# Altium PCB FLIR LWIR.PcbDoc (part 1 of 5)
Units mil, origin at the board's own origin, x right, y up, seen from the top; angles counter-clockwise.
Board outline 1511 x 3115 mil, 2 copper layers (Top Layer, Bottom Layer); 105 components, 128 nets, 625 pads, 229 vias.
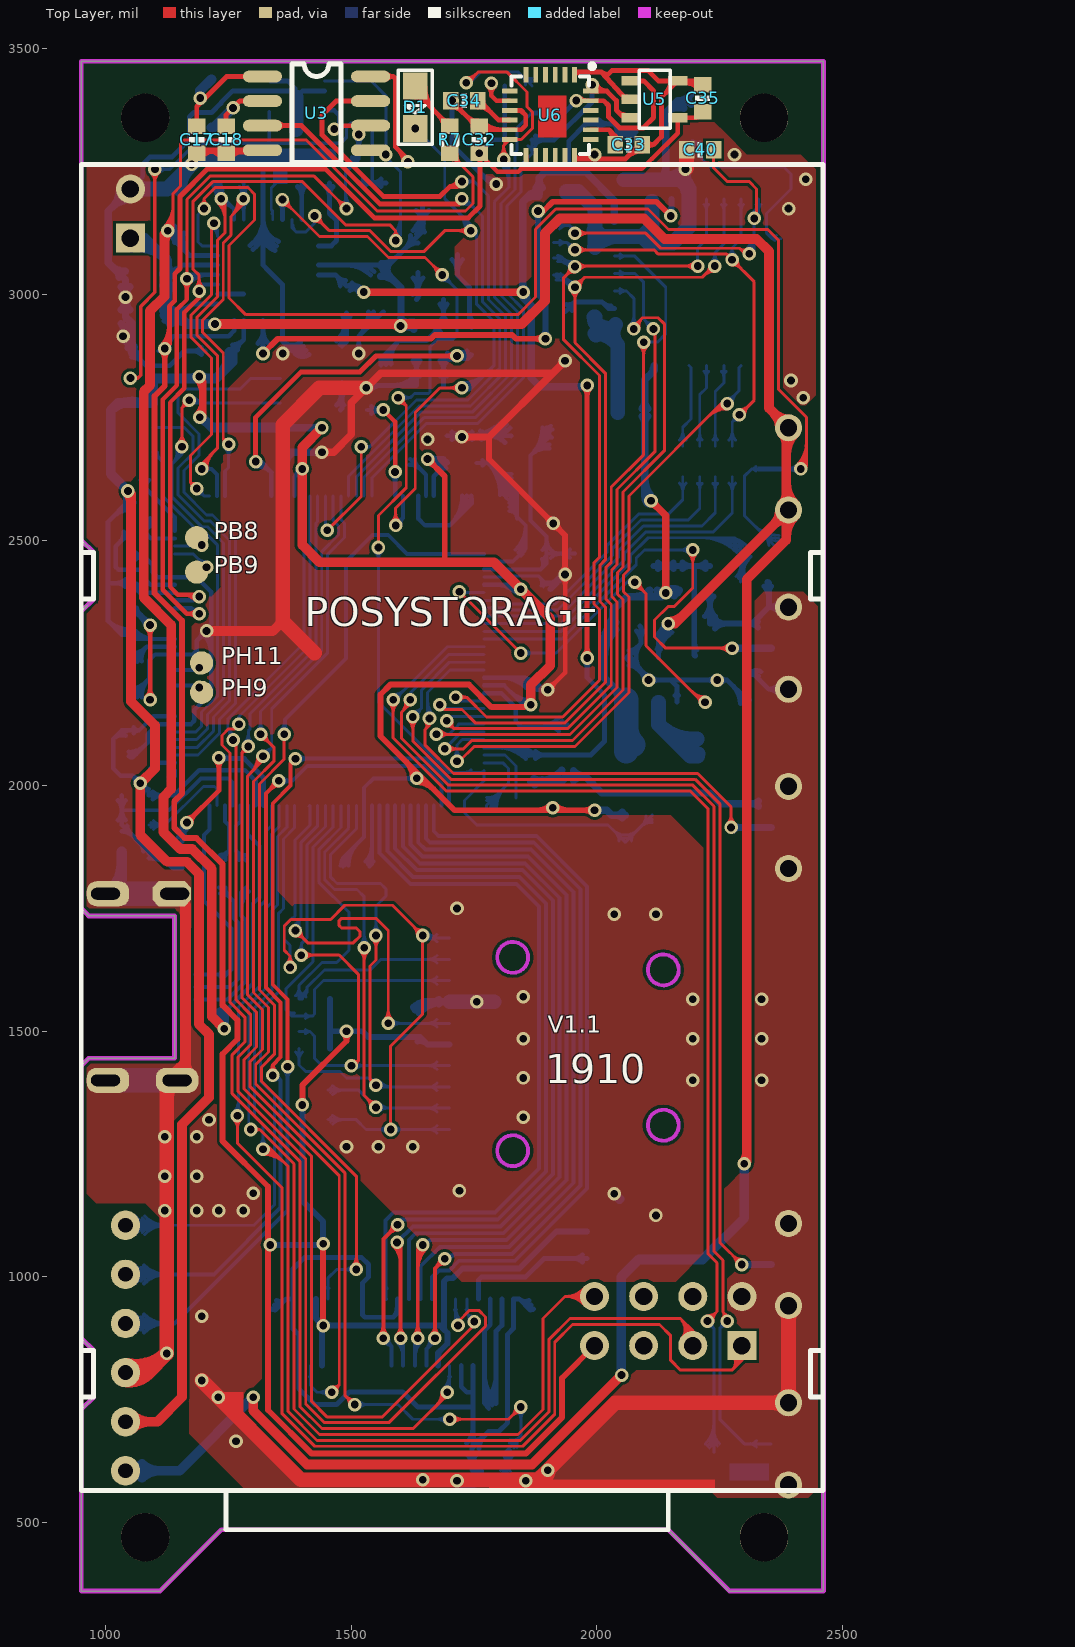
[diagram p0: Top Layer view]
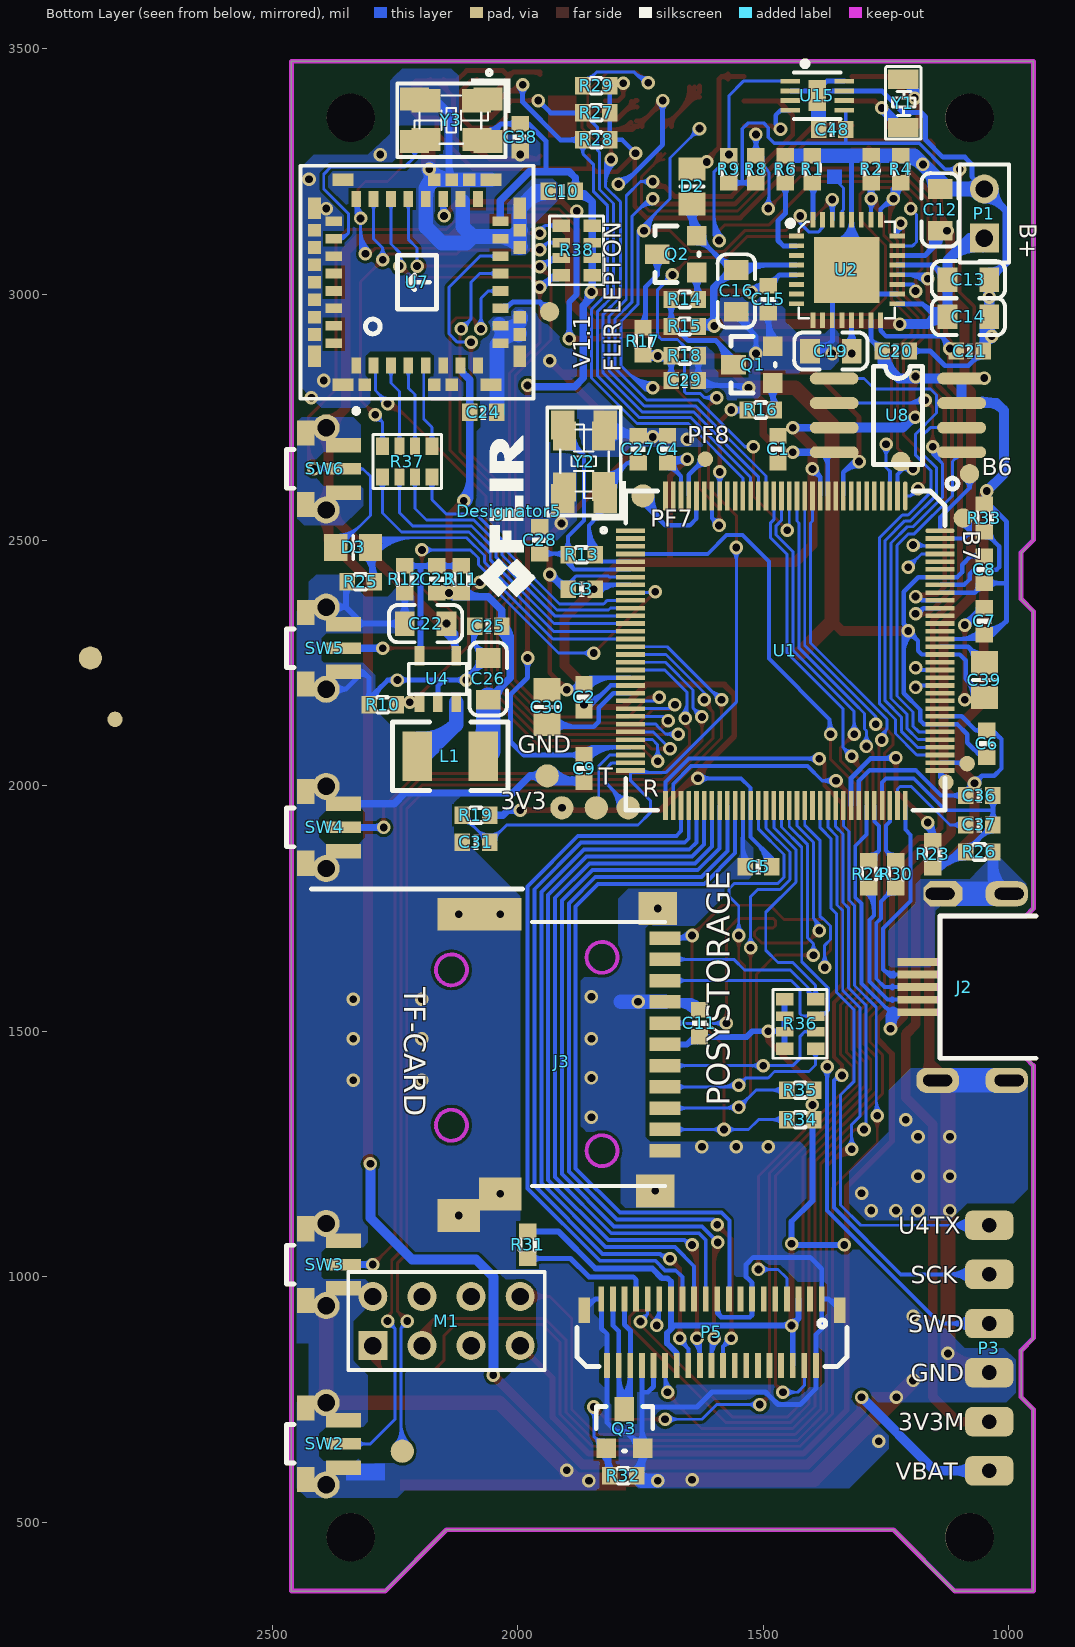
[diagram p1: Bottom Layer view, seen from below]
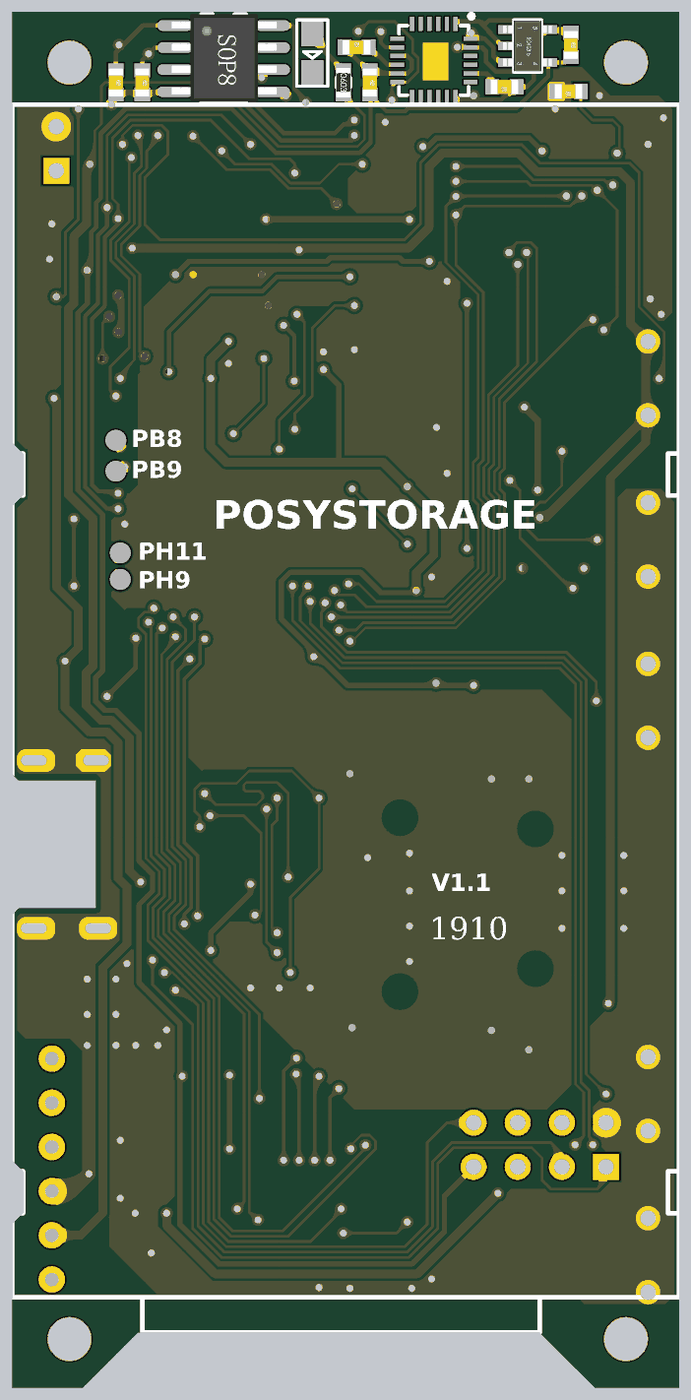
[diagram p6: 3D render of the assembled board from above, using the file's embedded part models]
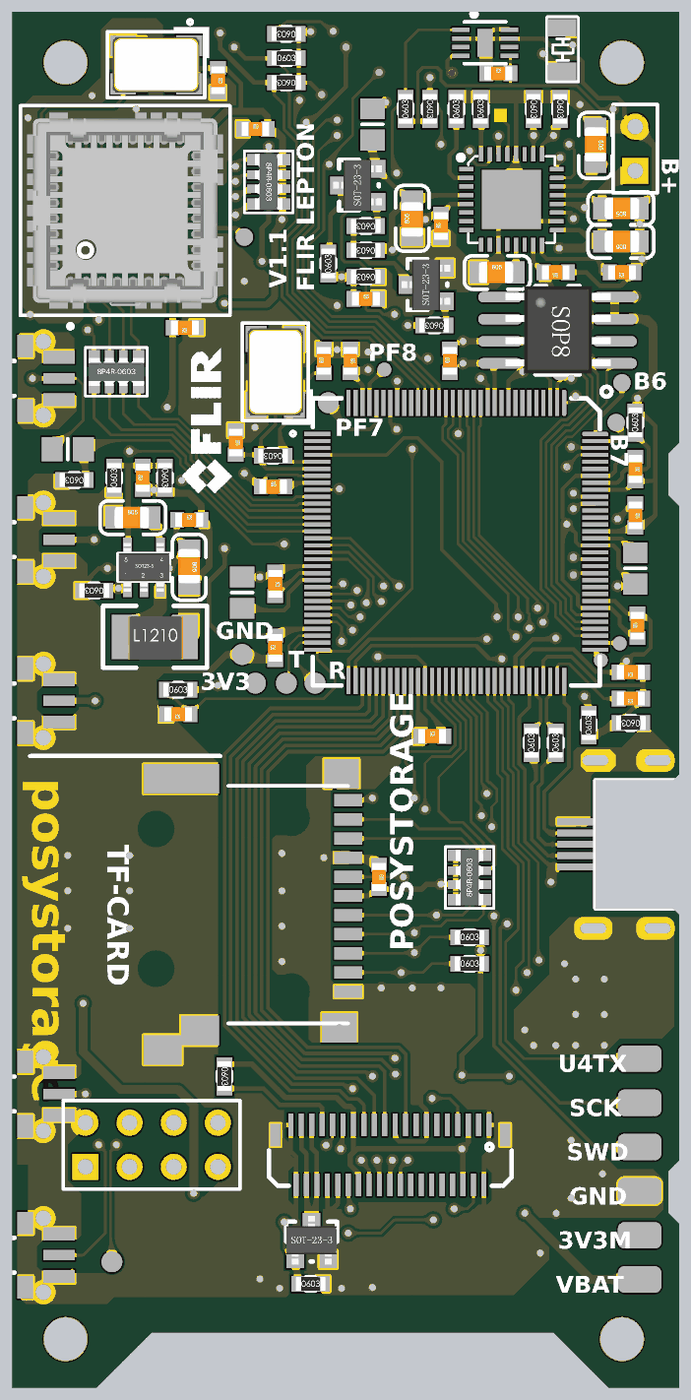
[diagram p7: 3D render of the assembled board from below, using the file's embedded part models]

## Layer stack, top to bottom
Top Solder: solder mask 0.4, Solder Resist, Dk 3.5
Top Layer: signal copper 1.4
Dielectric 1: dielectric 12.6, FR-4, Dk 4.8
Bottom Layer: signal copper 1.4
Bottom Solder: solder mask 0.4, Solder Resist, Dk 3.5

## Board outline
950,3475 950,2500 975,2475 975,2380 950,2355 950,1750 965,1735 1140,1735 1140,1445 975,1445 965,1445 950,1430 950,1415 950,875 970,855 975,850 975,755 950,730 950,360 1110,360 1235,485 2145,485 2270,360 2461,360 2461,3474 2460,3475

## Design rules (kind name [scope] priority, off if disabled: settings)
Clearance [All] p1: gap=6
DiffPairsRouting [All] p1: maxlimit=30 minlimit=6 mostfreqgap=6 toplayer_minwidth=6 toplayer_maxwidth=20 toplayer_prefwidth=9 bottomlayer_minwidth=6 bottomlayer_maxwidth=20 bottomlayer_prefwidth=9 maxuncoupledlength=500
HoleSize [All] p1: absolutevalues=TRUE maxlimit=10000 minlimit=12 maxpercent=80.000 minpercent=20.000
HoleToHoleClearance [All] p1: gap=0 allowstackedmicrovias=TRUE
MinimumSolderMaskSliver [All] p1: minsoldermaskwidth=0
PolygonConnect [All] p1: connectstyle=Direct reliefconductorwidth=10 reliefentries=4 polygonreliefangle="90 Angle" airgapwidth=10
RoutingVias [All] p1: holewidth=15.75 width=27.56 viastyle="Through Hole" minholewidth=11.81 minwidth=18 maxholewidth=3937.01 maxwidth=3937.01
SilkToSilkClearance [All] p1: silktosilkclearance=0
SilkToSolderMaskClearance [IsPad] p1: minsilkscreentomaskgap=0 clearancetoexposedcopper=TRUE
SolderMaskExpansion [All] p1: expansion=4
Width [All] p1: maxlimit=1000 minlimit=6 preferedwidth=10
23 further rules are at their usual default settings.

## Classes and differential pairs
differential pair USB_D: +USB_D_P -USB_D_N
differential pair USBHS: +USBHS_P -USBHS_N

## Components (designator, comment, footprint, x,y, rotation, side; value= is the part's Value field where it differs from the comment)
C1 "Cap" my0603_C#1 1470,2685 r90 bottom
C2 "Cap" my0603_C#1 1865,2180 r270 bottom
C3 "Cap" my0603_C#1 1870,2400 r180 bottom
C4 "Cap" my0603_C#1 1695,2685 r270 bottom
C5 "Cap" my0603_C#2 1510,1835 r180 bottom
C6 "Cap" my0603_C#1 1045,2085 r90 bottom
C7 "Cap" my0603_C#1 1050,2335 r270 bottom
C8 "Cap" my0603_C#1 1050,2440 r270 bottom
C9 "Cap" my0603_C#1 1865,2035 r90 bottom
C10 "Cap" my0603_C#1 1910,3210 r180 bottom
C11 "Cap" my0603_C#1 1630,1516.25 r270 bottom
C12 "Cap" MY0805_C 1140,3175 r270 bottom
C13 "Cap" MY0805_C 1080,3030 r0 bottom
C14 "Cap" MY0805_C 1080,2955 r0 bottom
C15 "Cap" my0603_C#1 1490,2990 r90 bottom
C16 "Cap" MY0805_C 1555,3005 r90 bottom
C17 "Cap" my0603_C#1 1185,3315 r270 top
C18 "Cap" my0603_C#1 1245,3315 r270 top
C19 "Cap" MY0805_C 1365,2885 r180 bottom
C20 "Cap" my0603_C#1 1230,2885 r0 bottom
C21 "Cap" my0603_C#1 1080,2885 r0 bottom
C22 "Cap" my0805_c 2190,2330 r180 bottom
C23 "Cap" my0603_C#1 2165,2420 r90 bottom
C24 "Cap" my0603_C#1 2070,2760 r0 bottom
C25 "Cap" my0603_C#1 2060,2325 r180 bottom
C26 "Cap" MY0805_C 2060,2220 r270 bottom
C27 "Cap" my0603_C#1 1755,2685 r90 bottom
C28 "Cap" my0603_C#1 1955,2500 r270 bottom
C29 "Cap" MY0603_C 1660,2825 r180 bottom
C30 "Cap" 6-0805_N 1940,2160 r270 bottom
C31 "Cap" my0603_C#1 2085,1885 r0 bottom
C32 "Cap" MY0603_c 1760,3315 r270 top
C33 "Cap" MY0603_c 2065,3305 r180 top
C34 "Cap" MY0603_c 1730,3395 r0 top
C35 "Cap" MY0603_c 2215,3400 r270 top
C36 "Cap" my0603_C#1 1060,1980 r0 bottom
C37 "Cap" my0603_C#1 1060,1920 r0 bottom
C38 "104" MY0603_C 1995,3320 r270 bottom
C39 "Cap" 6-0805_N 1050,2215 r270 bottom
C40 "Cap" my0603_C#1 2210,3295 r180 top
C48 "Cap" my0603_C#1 1360,3336 r180 bottom
D1 "LED" SMDLED 1630,3425 r270 top
D2 "Diode 0.7V" 6-0805_N 1645,3220 r90 bottom
D3 "Diode 0.7V" 6-0805_N 2335,2485 r180 bottom
Designator5 "Comment" "FLIR ICO" 2017,2560 r90 bottom
J2 "USB_M" USB_micro_沉板 1145,1590 r270 bottom locked
J3 "TF_card" TFCARD_完整二合一 1900,1485 r180 bottom locked
L1 "Inductor" L1210 2205,2060 r180 bottom
M1 "ESP01" HDR2X4 2295,860 r180 bottom
P1 "Header 2" HDR1X2 1050,3115 r90 bottom
P3 "DEBUG" Header6 1255,1240 r270 bottom
P5 "LCD_CMS2435TRKSZ2" FH26-39S-0.3SHW外框 1705,565 r0 top locked
Q1 "NPN" MY_SOT23_BJT 1480,2815 r90 bottom
Q2 "MOSFET-P" MY_SOT23_BJT 1635,3040 r90 bottom
Q3 "MOSFET-N" SOT23 1825,650 r180 bottom
R1 "Res2" my0603_R 1400,3255 r90 bottom
R2 "Res2" my0603_R 1280,3255 r270 bottom
R4 "Res2" my0603_R 1220,3255 r270 bottom
R6 "Res2" my0603_R 1455,3255 r90 bottom
R7 "Res2" MY0603_R 1700,3315 r270 top
R8 "Res2" my0603_R 1515,3255 r270 bottom
R9 "Res2" my0603_R 1570,3255 r90 bottom
R10 "Res2" my0603_R 2275,2165 r0 bottom
R11 "Res2" my0603_R 2115,2420 r270 bottom
R12 "Res2" my0603_R 2230,2420 r90 bottom
R13 "Res2" my0603_R 1870,2470 r0 bottom
R14 "Res2" my0603_R 1660,2990 r0 bottom
R15 "Res2" MY0603_R 1660,2935 r0 bottom
R16 "Res2" my0603_R 1505,2765 r0 bottom
R17 "Res2" MY0603_R 1745,2905 r90 bottom
R18 "Res2" MY0603_R 1660,2875 r0 bottom
R19 "Res2" my0603_R 2085,1940 r180 bottom
R23 "Res2" my0603_R 1155,1860 r90 bottom
R24 "Res2" my0603_R 1285,1820 r90 bottom
R25 "Res2" my0603_R 2320,2415 r0 bottom
R26 "Res2" my0603_R 1060,1865 r0 bottom
R27 "Res2" my0603_R 1840,3370 r180 bottom
R28 "Res2" my0603_R 1840,3315 r0 bottom
R29 "Res2" my0603_R 1840,3425 r0 bottom
R30 "Res2" my0603_R 1230,1820 r90 bottom
R31 "Res2" MY0603_R 1980,1065 r270 bottom
R32 "Res2" MY0603_R 1785,595 r180 bottom
R33 "Res2" MY0603_R 1050,2545 r90 bottom
R34 "Res2" MY0603_R 1425,1320 r180 bottom
R35 "Res2" MY0603_R 1425,1380 r180 bottom
R36 "103" RCA-8P4R-0603 1425,1515 r90 bottom
R37 "22" RCA-8P4R-0603 2225,2660 r180 bottom
R38 "10k" RCA-8P4R-0603 1880,3090 r270 bottom
SW2 "3x6x5" KEY_SMD_侧装大 2390,660 r270 bottom locked
SW3 "3x6x5" KEY_SMD_侧装大 2390,1025 r270 bottom locked
SW4 "3x6x5" KEY_SMD_侧装大 2390,1915 r270 bottom locked
SW5 "3x6x5" KEY_SMD_侧装大 2390,2280 r270 bottom locked
SW6 "3x6x5" KEY_SMD_侧装大 2390,2645 r270 bottom locked
U1 "M48x Series" LQFP128S 1455,2275 r270 bottom locked
U2 "LP3921" QFN32 1330,3050 r180 bottom locked
U3 "RX8010/PCF8563" SOP8 1320,3445 r0 top
U4 "MT3410L" sot23-5 2200,2170 r0 bottom
U5 "24c02" sot23_5 2120,3395 r90 top
U6 "MPU6050" QFN24 1905,3365 r270 top
U7 "LEPTON" Molex,_105028-1001_1 2205,3025 r90 bottom locked
U8 "W25Q32" sop8-flash 1225,2745 r180 bottom
U15 "SHT30" SHT30_DFN8 1390,3404.84 r270 bottom
Y1 "33.768K" XATL-FC-135 1215,3340 r90 bottom
Y2 "XATL" X-253250 1865,2660 r90 bottom locked
Y3 "25MHZ" X-253250 2135,3355 r0 bottom

## Footprints (in the part's own frame and the unit in brackets; to place one, negate y for a bottom-side part, rotate by r counter-clockwise, add the part's x,y. Pads: shape width x height; smd on the part's side, far side on the other; paste and mask are expansions set on the pad)
6-0805_N [mm] "Chip Resistor, Body 2.0x1.2mm, IPC Medium Density"
  rect 1.2x1.4 smd: 1(-0.9,0) 2(0.9,0)
  silkscreen extent 0,-0.6 0,0.6, body extent -1.07,-0.7 1.07,0.7, height 0.7
FH26-39S-0.3SHW外框 [mm]
  rect 0.6x1.3 smd far side: 0(-9.155,9.324) 0(4.053,9.324)
  rect 0.3x1.3 smd far side: 1(-8.229,9.906) 2(-7.929,6.456) 3(-7.629,9.906) 4(-7.329,6.456) 5(-7.029,9.906) 6(-6.729,6.456) 7(-6.429,9.906) 8(-6.129,6.456) 9(-5.829,9.906) 10(-5.529,6.456) 11(-5.229,9.906) 12(-4.929,6.456) 13(-4.629,9.906) 14(-4.329,6.456) 15(-4.029,9.906) 16(-3.729,6.456) 17(-3.429,9.906) 18(-3.129,6.456) 19(-2.829,9.906) 20(-2.529,6.456) 21(-2.229,9.906) 22(-1.929,6.456) 23(-1.629,9.906) 24(-1.329,6.456) 25(-1.029,9.906) 26(-0.729,6.456) 27(-0.429,9.906) 28(-0.129,6.456) 29(0.171,9.906) 30(0.471,6.456) 31(0.771,9.906) 32(1.071,6.456) 33(1.371,9.906) 34(1.671,6.456) 35(1.971,9.906) 36(2.271,6.456) 37(2.571,9.906) 38(2.871,6.456) 39(3.171,9.906)
  silkscreen extent -19.18,-2.03 19.18,68.58
"FLIR ICO" [mil]
  silkscreen extent -175,-53 153,60
HDR1X2 [mm] "Connector; Header; 2 Position"
  rect 1.5x1.5 hole 0.9: 1(0,0)
  round 1.5 hole 0.9: 2(2.54,0)
  silkscreen extent -1.27,-1.27 3.81,1.27
HDR2X4 [mm] "Connector; Header; 4x2 Position"
  rect 1.5x1.5 hole 0.9: 1(0,0)
  round 1.5 hole 0.9: 2(0,2.54) 3(2.54,0) 4(2.54,2.54) 5(5.08,0) 6(5.08,2.54) 7(7.62,0) 8(7.62,2.54)
  silkscreen extent -1.27,-1.27 8.89,3.81
Header6 [mil]
  rrect50% 60x98.43 smd: 1(635,215) 2(535,215) 3(435,215) 4(335,215) 5(235,215) 6(135,215)
KEY_SMD_侧装大 [mm] "侧装的按键"
  round 1.4 hole 0.9 mask+0: 1(-2.125,0) 1(2.125,0)
  rect 1.3x0.9 smd: 1(-1.85,-1.05) 1(1.85,-1.05)
  rect 0.75x1.8 smd: 1(-1.225,0.9) 1(1.225,0.9)
  rect 0.6x1.8 smd: 2(0,0.9)
  silkscreen extent -1,-2.05 1,-1.67
L1210 [mil]
  rect 60x100 smd: 1(0,0) 2(135,0)
  silkscreen extent -50,-70 185,70, body extent 7,-52 131,46, height 79
LQFP128S [mm] "0.4mm间距 14*14mm"
  oct 1.5x0.24 smd: 1(-8,6.2)
  rect 1.5x0.24 smd: 2(-8,5.8) 3(-8,5.4) 4(-8,5) 5(-8,4.6) 6(-8,4.2) 7(-8,3.8) 8(-8,3.4) 9(-8,3) 10(-8,2.6) 11(-8,2.2) 12(-8,1.8) 13(-8,1.4) 14(-8,1) 15(-8,0.6) 16(-8,0.2) 17(-8,-0.2) 18(-8,-0.6) 19(-8,-1) 20(-8,-1.4) 21(-8,-1.8) 22(-8,-2.2) 23(-8,-2.6) 24(-8,-3) 25(-8,-3.4) 26(-8,-3.8) 27(-8,-4.2) 28(-8,-4.6) 29(-8,-5) 30(-8,-5.4) 31(-8,-5.8) 32(-8,-6.2) 65(8,-6.2) 66(8,-5.8) 67(8,-5.4) 68(8,-5) 69(8,-4.6) 70(8,-4.2) 71(8,-3.8) 72(8,-3.4) 73(8,-3) 74(8,-2.6) 75(8,-2.2) 76(8,-1.8) 77(8,-1.4) 78(8,-1) 79(8,-0.6) 80(8,-0.2) 81(8,0.2) 82(8,0.6) 83(8,1) 84(8,1.4) 85(8,1.8) 86(8,2.2) 87(8,2.6) 88(8,3) 89(8,3.4) 90(8,3.8) 91(8,4.2) 92(8,4.6) 93(8,5) 94(8,5.4) 95(8,5.8) 96(8,6.2)
  rect 0.24x1.5 smd: 33(-6.2,-8) 34(-5.8,-8) 35(-5.4,-8) 36(-5,-8) 37(-4.6,-8) 38(-4.2,-8) 39(-3.8,-8) 40(-3.4,-8) 41(-3,-8) 42(-2.6,-8) 43(-2.2,-8) 44(-1.8,-8) 45(-1.4,-8) 46(-1,-8) 47(-0.6,-8) 48(-0.2,-8) 49(0.2,-8) 50(0.6,-8) 51(1,-8) 52(1.4,-8) 53(1.8,-8) 54(2.2,-8) 55(2.6,-8) 56(3,-8) 57(3.4,-8) 58(3.8,-8) 59(4.2,-8) 60(4.6,-8) 61(5,-8) 62(5.4,-8) 63(5.8,-8) 64(6.2,-8) 97(6.2,8) 98(5.8,8) 99(5.4,8) 100(5,8) 101(4.6,8) 102(4.2,8) 103(3.8,8) 104(3.4,8) 105(3,8) 106(2.6,8) 107(2.2,8) 108(1.8,8) 109(1.4,8) 110(1,8) 111(0.6,8) 112(0.2,8) 113(-0.2,8) 114(-0.6,8) 115(-1,8) 116(-1.4,8) 117(-1.8,8) 118(-2.2,8) 119(-2.6,8) 120(-3,8) 121(-3.4,8) 122(-3.8,8) 123(-4.2,8) 124(-4.6,8) 125(-5,8) 126(-5.4,8) 127(-5.8,8)
  oct 0.24x1.5 smd: 128(-6.2,8)
  silkscreen extent -8.92,-8.26 8.26,8.92
Molex,_105028-1001_1 [mm]
  rect 0.84x0.5 smd paste+0 mask+0: 1(-4.31,3.15) 2(-4.31,2.25) 3(-4.31,1.35) 4(-4.31,0.45) 5(-4.31,-0.45) 6(-4.31,-1.35) 7(-4.31,-2.25) 8(-4.31,-3.15) 17(4.31,-3.15) 18(4.31,-2.25) 19(4.31,-1.35) 20(4.31,-0.45) 21(4.31,0.45) 22(4.31,1.35) 23(4.31,2.25) 24(4.31,3.15)
  rect 0.5x0.84 smd paste+0 mask+0: 9(-3.15,-4.31) 10(-2.25,-4.31) 11(-1.35,-4.31) 12(-0.45,-4.31) 13(0.45,-4.31) 14(1.35,-4.31) 15(2.25,-4.31) 16(3.15,-4.31) 25(3.15,4.31) 26(2.25,4.31) 27(1.35,4.31) 28(0.45,4.31) 29(-0.45,4.31) 30(-1.35,4.31) 31(-2.25,4.31) 32(-3.15,4.31)
  rect 1.1x0.65 smd paste+0 mask+0: 33(-3.83,5.305) 41(3.83,5.305) 60(-3.83,-5.305) 68(3.83,-5.305)
  rect 0.65x0.65 smd paste+0 mask+0: 34(-2.7,5.305) 35(-1.8,5.305) 36(-0.9,5.305) 37(0,5.305) 38(0.9,5.305) 39(1.8,5.305) 40(2.7,5.305) 44(-5.305,2.7) 52(-5.305,-0.9) 53(5.305,-0.9) 54(-5.305,-1.8) 55(5.305,-1.8) 57(5.305,-2.7) 61(-2.7,-5.305) 62(-1.8,-5.305) 66(1.8,-5.305) 67(2.7,-5.305)
  rect 0.65x1.1 smd paste+0 mask+0: 42(-5.305,3.83) 43(5.305,3.83) 58(-5.305,-3.83) 59(5.305,-3.83)
  silkscreen extent -6.78,-6.02 6.02,6.02, body extent -5.48,-5.3 5.3,5.3, height 4.21
my0603_C#1 [mm]
  rect 0.8x0.9 smd: 1(-0.7,0) 2(0.7,0)
  silkscreen extent -0.13,-0.38 0.13,0.38, body extent -0.8,-0.4 0.8,0.4, height 0.3
my0603_C#2 [mm]
  rect 0.8x0.9 smd: 1(-0.675,0) 2(0.7,0)
  silkscreen extent -0.13,-0.38 0.13,0.38, body extent -0.8,-0.4 0.8,0.4, height 0.3
MY0603_C [mm]
  rect 0.8x0.9 smd: 1(-0.7,0) 2(0.7,0)
  silkscreen extent -0.13,-0.38 0.13,0.38, body extent -0.8,-0.4 0.8,0.4, height 0.3
MY0603_c [mm]
  rect 0.8x0.9 smd: 1(-0.7,0) 2(0.7,0)
  silkscreen extent -0.13,-0.38 0.13,0.38, body extent -0.8,-0.4 0.8,0.4, height 0.3
my0603_R [mm]
  rect 0.8x0.9 smd: 1(-0.7,0) 2(0.7,0)
  silkscreen extent -0.25,-0.38 0.25,0.38, body extent -0.85,-0.4 0.85,0.4, height 0.56
MY0603_R [mm]
  rect 0.8x0.9 smd: 1(-0.7,0) 2(0.7,0)
  silkscreen extent -0.25,-0.38 0.25,0.38, body extent -0.85,-0.4 0.85,0.4, height 0.56
MY0805_C [mil]
  rect 40x50 smd: 1(-40,0) 2(45,0)
  silkscreen extent -72,-38 77,38, body extent -39,-25 39,25, height 30
my0805_c [mil]
  rect 40x50 smd: 1(-40,0) 2(45,0)
  silkscreen extent -72,-38 77,38, body extent -39,-25 39,25, height 30
MY_SOT23_BJT [mil]
  rect 40x40 smd: 1(4.88,0.63) 2(79.88,0.63)
  rect 40x50 smd: 3(41.88,80.63)
  silkscreen extent -15,-4 100,86, body extent -15,-11 99,99, height 47
QFN24 [mm]
  rect 0.8x0.25 smd: 1(-2.101,1.25) 2(-2.101,0.75) 3(-2.101,0.25) 4(-2.101,-0.25) 5(-2.101,-0.75) 6(-2.101,-1.25) 13(2.101,-1.25) 14(2.101,-0.75) 15(2.101,-0.25) 16(2.101,0.25) 17(2.101,0.75) 18(2.101,1.25)
  rect 0.25x0.8 smd: 7(-1.25,-2.101) 8(-0.75,-2.101) 9(-0.25,-2.101) 10(0.25,-2.101) 11(0.75,-2.101) 12(1.25,-2.101) 19(1.25,2.101) 20(0.75,2.101) 21(0.25,2.101) 22(-0.25,2.101) 23(-0.75,2.101) 24(-1.25,2.101)
  silkscreen extent -2.66,-2 2,2.28
QFN32 [mm]
  rect 0.8x0.25 smd: 1(-2.601,1.75) 2(-2.601,1.25) 3(-2.601,0.75) 4(-2.601,0.25) 5(-2.601,-0.25) 6(-2.601,-0.75) 7(-2.601,-1.25) 8(-2.601,-1.75) 17(2.601,-1.75) 18(2.601,-1.25) 19(2.601,-0.75) 20(2.601,-0.25) 21(2.601,0.25) 22(2.601,0.75) 23(2.601,1.25) 24(2.601,1.75)
  rect 0.25x0.8 smd: 9(-1.75,-2.601) 10(-1.25,-2.601) 11(-0.75,-2.601) 12(-0.25,-2.601) 13(0.25,-2.601) 14(0.75,-2.601) 15(1.25,-2.601) 16(1.75,-2.601) 25(1.75,2.601) 26(1.25,2.601) 27(0.75,2.601) 28(0.25,2.601) 29(-0.25,2.601) 30(-0.75,2.601) 31(-1.25,2.601) 32(-1.75,2.601)
  rect 3.4x3.4 smd: 33(0,0)
  silkscreen extent -3.06,-2.49 2.49,2.55
RCA-8P4R-0603 [mm] "3.2mm*1.6mm*0.6mm(长*宽*厚)"
  rect 0.65x0.9 smd: 1(-1.28,-0.8) 4(1.28,-0.8) 5(1.28,0.8) 8(-1.28,0.8)
  rect 0.5x0.9 smd: 2(-0.4,-0.8) 3(0.4,-0.8) 6(0.4,0.8) 7(-0.4,0.8)
  silkscreen extent -1.78,-1.4 1.78,1.4, body extent -1.6,-0.8 1.6,0.8, height 0.6
SHT30_DFN8 [mm]
  rect 0.25x1 smd: 1(-0.75,-1.397) 2(-0.25,-1.397) 3(0.25,-1.397) 4(0.75,-1.397) 5(0.75,1.397) 6(0.25,1.397) 7(-0.25,1.397) 8(-0.75,1.397)
  rect 1.6x0.9 smd: 9(0,0)
  silkscreen extent -1.78,-1.2 1.2,1.2
SMDLED [mm]
  rect 1.4x1.27 smd: 1(0.001,-0.002) 2(2.211,-0.002)
  silkscreen extent -0.8,-0.89 3.01,0.89
SOP8 [mil]
  oval 80x24 smd: 1(-1,-1) 2(-1,-51) 3(-1,-101) 4(-1,-151) 5(219,-151) 6(219,-101) 7(219,-51) 8(219,-1)
  silkscreen extent 59,-176 159,24, body extent -9,-174 229,24, height 63
sop8-flash [mil]
  oval 99.69x24 smd: 1(-130.67,84) 2(-130.67,34) 3(-130.67,-16) 4(-130.67,-66) 5(128.7,-66) 6(128.7,-16) 7(128.7,34) 8(128.7,84)
  silkscreen extent -51,-91 49,109, body extent -119,-89 119,109, height 63
SOT23 [mil]
  rect 40x40 smd: 1(4.88,0.63) 3(79.88,0.63)
  rect 40x50 smd: 2(41.88,80.63)
  silkscreen extent -15,-4 100,86, body extent -15,-11 99,99, height 47
sot23-5 [mm]
  rect 0.5x1 smd: 1(0,0) 2(-0.95,0) 3(-1.9,0) 4(-1.9,-2.4) 5(0,-2.4)
  silkscreen extent -2.45,-2 0.55,-0.4, body extent -2.4,-2.6 0.5,0.2, height 1.09
sot23_5 [mm]
  rect 0.5x1 smd: 1(1.016,1.27) 2(0.066,1.27) 3(-0.884,1.27) 4(-0.884,-1.13) 5(1.016,-1.13)
  silkscreen extent -1.43,-0.73 1.57,0.87, body extent -1.38,-1.33 1.52,1.47, height 1.09
TFCARD_完整二合一 [mm]
  rect 1.6x0.7 smd: 1(5.08,-2.497) 2(5.08,-1.397) 3(5.08,-5.797) 4(5.08,-0.297) 5(5.08,0.803) 6(5.08,1.903) 7(5.08,3.003) 8(5.08,4.103) 9(5.08,-3.597) 10(5.08,-4.697) 10(5.08,5.203)
  rect 2.2x1.7 smd: 3(-5.588,-9.144) 3(-5.588,6.433) 3(-3.438,-8.027) 3(-3.438,6.433)
  rect 2x1.7 smd: 3(4.572,-7.874) 3(4.699,6.731)
  Top Layer lines w0.508: -3.438,-8.027 -3.71,-8.299
  Keep-Out Layer circle w0.2: c1.819,4.203 r0.8
  Keep-Out Layer circle w0.2: c1.819,-5.797 r0.8
  Keep-Out Layer circle w0.2: c-5.969,3.556 r0.8
  Keep-Out Layer circle w0.2: c-5.969,-4.48 r0.8
  silkscreen extent -1.82,-7.63 5.08,6.03
USB_micro_沉板 [mm]
  rect 0.4x2.25 smd: 1(1.3,-0.94) 2(0.65,-0.94) 3(0,-0.94) 4(-0.65,-0.94) 5(-1.3,-0.94)
  oct 1.3x2 hole 0.6 slot 1.5 at 90 deg copper offset 0,0.152 mask+0: 5(-4.826,0.127)
  rrect80% 1.3x2.2 hole 0.6 slot 1.5 at 90 deg copper offset 0,-0.127 mask+0: 5(-4.826,3.7) 5(4.826,3.7)
  rrect80% 1.3x2.2 hole 0.6 slot 1.5 at 90 deg mask+0: 5(4.826,0)
  silkscreen extent -3.68,0.13 3.68,5.08
X-253250 [mm]
  rect 1.5x1.2 smd: 1(-1.9,-1.1) 1(-1.295,-1.003) 2(1.321,-1.003) 2(1.9,-1.1) 3(1.321,1.003) 3(1.9,1.1) 4(-1.9,1.1) 4(-1.321,1.003)
  silkscreen extent -3.68,-2.16 2.8,1.9, body extent -2.5,-1.6 2.5,1.6, height 1
XATL-FC-135 [mm]
  rect 1x1.6 smd: 1(0,0) 2(2.5,0)
  silkscreen extent -0.6,-0.92 3.15,0.91

## Part data
C1 C2 C3 C4 C5 C6 C7 C8 C9 C10 C11 C12 C13 C14 C15 C16 C17 C18 C19 C20 C21 C22 C23 C24 C25 C26 C27 C28 C29 C30 C31 C32 C33 C34 C35 C36 C37 C39 C40 C48: "Capacitor"
C38: library part "Cap Chip 2", "Chip Capacitor, Silkscreen Border"
D1: library part "Diode LED", "High Conductance Fast Diode"
D2 D3: library part Diode, "Default Diode"
J3: library part sd_card
M1: "ESP01 ESP8266"
P1: "Header, 2-Pin"
P3: library part "Header 6", "Header, 6-Pin"
Q1: library part NPN_SOT23, "NPN Bipolar Transistor"
Q2: library part MOSFET-P_SOT23, "P-Channel MOSFET"
Q3: "N-Channel MOSFET"
R1 R2 R4 R6 R7 R8 R9 R10 R11 R12 R13 R14 R15 R16 R17 R18 R19 R23 R24 R25 R26 R27 R28 R29 R30 R31 R32 R33 R34 R35: "Resistor"
R36 R37 R38: library part R-8P4R, "贴片网络排阻"
SW2 SW3 SW4 SW5 SW6: library part "TSW 3x6", "3x6轻触开关"
U1: library part "Nuvoton M48x Series 复用", "Nuvoton M48x Series"
U5: library part Component_1
U7: "FLIR LEPTON LWIR"
U8: library part W25X16, "W25X16;SST25VF016;MX25L1605"
Y1: library part 晶振
Y2: library part 晶振, "5032晶振"
Y3: library part XTAL1

## Free pads (board coordinates)
  round 60 hole 30: 0(1040,1005) 1(1040,905) 2(1040,805) 3(1040,605) 3(1040,705) 3(1040,1105)
  round 98.43 hole 98.43: 0(1080,470) 0(1080,3360) 0(2340,470) 0(2340,3360)
  round 39.37 smd far side: 1(1080,2635) 1(1093,2545) 1(1220,2660) 1(1935,2965)
  round 31.5 smd far side: 1(1085,2045) 1(1128,2007) 1(1618,2665) 1(2820,2135)
  round 47.24 smd: 1(1185,2435) 1(1185,2505) 1(1195,2190) 1(1195,2250)
  round 47.24 smd far side: 1(1745,2590) 1(1775,1955) 1(1840,1955) 1(1910,1955) 1(1940,2020) 1(2235,645) 1(2870,2260)

## Via types
v1: diameter 27.56, hole 15.75, Top Layer to Bottom Layer, tented both sides, 229 vias

## Nets (pads, with @x,y where several pads share a name; then routed paths per layer and width w, separated by ;. In a path a pad name is that pad's centre, name@x,y a point inside that pad or via, vN(x,y) a via of type N, cw(c..) or ccw(c..) an arc to the next point about the centre after c; other vN are vias at no path point)
6050_INT: R29.2 U1.20 U6.12 | length 1770.2
  Top Layer w6: v1@1734,3435.78 ccw(c1734,3452.15) 1745.57,3440.57 ; v1@1734,3441.78 ccw(c1734,3472.63) 1755.82,3450.82 ; v1@1735,3430 1757.78,3452.78 1817.11,3452.78 1857.4,3412.49 1857.4,3382.4 1869,3370.8 1869,3339.2 1845.59,3315.79 U6.12@1822.28,3315.79 1810,3303.51 ; v1@1744.78,3431 cw(c1765.98,3431) 1750.99,3445.99 ; v1@1802.38,3282.62 ccw(c1783.98,3301.02) 1810,3301.02 ccw(c1836.02,3301.02) v1@1817.62,3282.62 ; v1(1810,3275) 1810,3303.51 ; U6.12@1810.07,3314.45 cw(c1804.5,3309.02) 1810,3303.51 ; 1814.3,3307.81 ccw(c1808.85,3313.26) U6.12@1814.37,3318.63
  Bottom Layer w6: U1.20@1510.12,2589.96 1510.12,2629.06 1642.37,2761.31 1747.22,2761.31 1826,2840.09 1826,2960.06 1791,2995.06 1791,3188.78 1821.28,3219.07 1821.28,3265 1811.28,3275 v1(1810,3275) ; v1(1734,3431) 1741,3431 1762.78,3452.78 ; v1@1734.21,3435.77 ccw(c1735.31,3460.96) 1753.14,3443.14 ; v1@1734.47,3441.77 ccw(c1736.11,3479.44) 1762.78,3452.78 ; v1@1744.78,3431 cw(c1753.9,3431) 1747.45,3437.45 ; v1@1802.38,3267.38 cw(c1756.74,3221.74) 1821.28,3221.74 ; v1@1806.62,3271.62 cw(c1771.22,3236.22) 1821.28,3236.22 ; v1@1810.86,3275.86 cw(c1785.71,3250.71) 1821.28,3250.71 ; v1@1815.11,3280.11 cw(c1800.19,3265.19) 1821.28,3265.19 ; 1842.44,3450.12 ccw(c1867.56,3475.25) R29.2@1867.56,3439.72 ; 1847.19,3445.37 cw(c1828.79,3426.97) R29.2@1854.81,3426.97 ; R29.2@1852.68,3439.88 ccw(c1867.56,3454.76) R29.2@1867.56,3433.72 ; R29.2@1867.56,3425 1839.78,3452.78 1762.78,3452.78
AC_OK: D1.2 U1.26 U2.31 | length 2057.9
  Top Layer w6: v1@1425,3149.22 cw(c1425,3123.2) 1443.4,3141.6 cw(c1461.8,3160) v1@1435.78,3160 ; v1(1425,3160) 1455,3130 1537.78,3130 1580.56,3087.22 1647.22,3087.22 1690,3130 v1@1745,3130 ; v1@1582.38,2537.62 ccw(c1563.98,2556.02) 1590,2556.02 ccw(c1616.02,2556.02) v1@1597.62,2537.62 ; v1(1590,2530) 1590,2565 1630,2605 1630,2760 1680,2810 v1(1725,2810) ; v1@1717.38,2802.38 ccw(c1698.98,2783.98) 1698.98,2810 ccw(c1698.98,2836.02) v1@1717.38,2817.62 ; v1@1735.38,3122.38 ccw(c1716.98,3103.98) 1716.98,3130 ccw(c1716.98,3156.02) v1@1735.38,3137.62
  Bottom Layer w6: U2.31@1379.21,3152.41 1379.21,3135.79 1387.34,3127.66 1407.66,3127.66 1425,3145 ; U2.31@1381.13,3141.58 ccw(c1399.76,3141.58) 1386.59,3128.41 ; v1@1421.56,3149.78 cw(c1419.95,3145) 1425,3145 ; v1(1425,3160) 1425,3145 ; v1@1428.44,3149.78 ccw(c1430.05,3145) 1425,3145 ; v1@1629.94,3327.18 cw(c1629.94,3301.16) 1648.34,3319.56 cw(c1666.74,3337.96) v1@1640.72,3337.96 ; v1(1629.94,3337.96) 1690,3277.9 1690,3195 1755,3130 1755,2980.15 1790,2945.15 1790,2855 1741,2806 ; 1716.11,3168.89 cw(c1677.23,3130) v1@1732.22,3130 ; v1@1725,2802.78 ccw(c1725,2833.63) 1746.82,2811.82 ; v1@1725,2806 1741,2806 ; v1@1725,2808.78 ccw(c1725,2854.12) 1757.06,2822.06 ; v1@1725,2814.78 ccw(c1725,2874.6) 1767.3,2832.3 ; v1@1725,2820.78 ccw(c1725,2895.09) 1777.54,2842.54 ; 1726.36,3158.64 cw(c1697.71,3130) v1@1738.22,3130 ; v1@1732.74,2802.5 cw(c1741,2794.51) 1741,2806 ; v1@1735.75,2810.85 ccw(c1741,2811.27) 1741,2806 ; 1736.6,3148.4 cw(c1718.2,3130) v1@1744.22,3130
  Bottom Layer w8: v1(1590,2530) 1604.61,2544.61 ; v1@1590.97,2539.73 ccw(c1592.64,2556.57) 1604.61,2544.61 ; v1@1599.73,2530.97 cw(c1616.57,2532.64) 1604.61,2544.61 ; U1.26@1604.61,2589.96 1604.61,2544.61
  other v1: 1743,3130
BAT_ADC: C29.1 R17.1 R18.2 U1.9 | length 1132.7
  Top Layer w10: v1(1305,2660) 1305,2750 1397.5,2842.5 1517.5,2842.5 1550,2875 v1(1715,2875) ; v1@1708.79,2868.79 ccw(c1693.8,2853.8) 1693.8,2875 ccw(c1693.8,2896.2) v1@1708.79,2881.21
  Bottom Layer w9: U1.9@1336.89,2589.96 1336.89,2638.11
  Bottom Layer w10: v1(1305,2660) 1315,2660 1336.89,2638.11 ccw(c1305.24,2606.46) v1@1305.04,2651.22 ; v1@1304.99,2661.22 cw(c1305.09,2640.24) 1319.92,2655.08 ; C29.1@1679.96,2834.57 ccw(c1661.61,2852.92) 1687.56,2852.92 ccw(c1713.51,2852.92) C29.1@1695.16,2834.57 ; R18.2@1679.96,2865.43 cw(c1661.61,2847.08) 1687.56,2847.08 cw(c1713.51,2847.08) 1695.16,2865.43 cw(c1706.19,2854.4) v1@1706.19,2870 ; C29.1@1687.56,2815 R18.2@1687.56,2870 ; R18.2@1694.13,2866.77 ccw(c1689.25,2884.95) v1@1706.81,2878.16 ; R18.2@1695.16,2880.63 ccw(c1720.83,2906.3) v1@1720.83,2870 ; R18.2@1699.12,2870 ccw(c1699.12,2921.35) R17.1@1735.43,2885.04 ; R18.2@1700.04,2870.15 cw(c1702.2,2857.11) v1@1709.89,2867.86 ; R18.2@1701.13,2868.64 cw(c1704.36,2856.58) v1@1710.61,2867.4 ; v1@1707.96,2880.24 cw(c1687.56,2895.43) R18.2@1687.56,2870 ; v1@1718.35,2883.11 ccw(c1725.12,2899.49) R17.1@1734.48,2884.45 ; v1@1722.81,2879.01 ccw(c1737.56,2886.57) R17.1@1737.56,2870 ; v1@1723.26,2870 ccw(c1723.26,2897.21) R17.1@1742.5,2877.97 ; v1@1723.55,2873.01 cw(c1736.63,2869.97) R17.1@1729.53,2881.37 ; R17.1@1745,2877.44 R17.1@1737.56,2870 ; R18.2@1687.56,2870 R17.1@1737.56,2870
CA_IO0: R37.1 U1.45 | length 716.8
  Bottom Layer w6: U1.45@1769.96,2330.12 1926.03,2330.12 2055.93,2460.01 2055.93,2473.39 2099.31,2516.78 2236.78,2516.78 2275.39,2555.39 R37.1@2275.39,2628.5 ; R37.1@2268.47,2616.66 cw(c2251.75,2599.93) 2275.39,2599.93 cw(c2299.04,2599.93) R37.1@2282.32,2616.66
CA_IO1: R37.2 U1.44 | length 664.3
  Bottom Layer w6: U1.44@1769.96,2345.87 1924.81,2345.87 2043.93,2464.99 2043.93,2478.37 2094.34,2528.78 2213.78,2528.78 2240.75,2555.75 R37.2@2240.75,2628.5 ; R37.2@2235.91,2615.79 cw(c2224.23,2604.11) 2240.75,2604.11 cw(c2257.27,2604.11) R37.2@2245.59,2615.79
CA_IO2: R37.3 U1.43 | length 624.4
  Bottom Layer w6: U1.43@1769.96,2361.61 1811.25,2361.61 1815,2357.87 1919.84,2357.87 2031.93,2469.96 2031.93,2483.34 2089.37,2540.78 2185.78,2540.78 2209.25,2564.25 R37.3@2209.25,2628.5 ; R37.3@2204.41,2615.79 cw(c2192.73,2604.11) 2209.25,2604.11 cw(c2225.77,2604.11) R37.3@2214.09,2615.79
CA_PWD: R37.8 R38.2 U7.23 | length 1246.8
  Top Layer w6: v1(1955,3091) 2116.07,3091 2124.85,3082.22 2263.78,3082.22 ; v1@1962.62,3083.38 cw(c1981.02,3064.98) 1981.02,3091 cw(c1981.02,3117.02) v1@1962.62,3098.62 ; v1@2265.11,3075.28 ccw(c2259.33,3077.77) 2263.78,3082.22 ; v1@2270.72,3080.89 cw(c2268.23,3086.67) 2263.78,3082.22 ; v1@2275,3060.22 cw(c2275,3034.2) 2293.4,3052.6 cw(c2311.8,3071) v1@2285.78,3071 ; v1(2290,2755) 2320,2785 2320,3026 v1(2275,3071) 2263.78,3082.22 ; v1@2290,2765.78 ccw(c2290,2791.8) 2308.4,2773.4 ccw(c2326.8,2755) v1@2300.78,2755
  Bottom Layer w6: R38.2@1911.5,3105.75 1939.25,3105.75 ; R38.2@1924.21,3100.91 cw(c1935.89,3089.23) 1935.89,3105.75 cw(c1935.89,3122.27) R38.2@1924.21,3110.59 ; v1@1944.26,3091.95 ccw(c1926.99,3093.49) 1939.25,3105.75 ; v1@1952.93,3101.58 cw(c1950,3116.5) 1939.25,3105.75 ; v1@1955,3090 1939.25,3105.75 ; v1@2267.84,3079.06 ccw(c2253.67,3095) 2275,3095 ; R37.8@2268.47,2703.34 ccw(c2251.75,2720.07) 2275.39,2720.07 ccw(c2299.04,2720.07) R37.8@2282.32,2703.34 ; v1(2275,3071) 2275,3095 ; R37.8@2275.39,2691.5 2275.39,2740.39 ; v1@2279.39,2753.11 cw(c2265.21,2750.58) 2275.39,2740.39 ; v1@2282.16,3079.06 cw(c2296.33,3095) 2275,3095 ; v1@2288.11,2744.39 ccw(c2285.58,2730.21) 2275.39,2740.39 ; U7.23@2288.74,3183.15 cw(c2277.06,3171.47) 2293.58,3171.47 cw(c2310.1,3171.47) U7.23@2298.42,3183.15 ; v1(2290,2755) 2275.39,2740.39 ; U7.23@2293.58,3194.68 2293.58,3113.58 2275,3095
CA_PWRD: R37.4 U1.42 | length 586.9
  Bottom Layer w6: U1.42@1769.96,2377.36 1817.5,2377.36 1825,2369.87 1914.87,2369.87 2019.93,2474.93 2019.93,2488.31 2084.4,2552.78 2145,2552.78 2174.61,2582.39 R37.4@2174.61,2628.5 ; R37.4@2167.68,2616.66 cw(c2150.96,2599.93) 2174.61,2599.93 cw(c2198.25,2599.93) R37.4@2181.53,2616.66
CA_RST: C40.1 R38.1 U7.24 | length 1089.4
  Top Layer w6: v1(1955,3125) 2099.04,3125 2129.82,3094.22 2290,3094.22 ; v1@1962.62,3117.38 cw(c1981.02,3098.98) 1981.02,3125 cw(c1981.02,3151.02) v1@1962.62,3132.62 ; C40.1@2237.56,3295 2237.56,3257.44 2265,3230 2310,3230 2325,3215 2325,3160 v1(2320,3155) ; 2295.51,3088.71 ccw(c2302.58,3095.77) v1@2307.6,3087.13 ; v1@2304.58,3092.32 cw(c2298.53,3102.75) 2290,3094.22 ; v1(2310,3083) 2301.22,3083 2290,3094.22
  Bottom Layer w6: R38.1@1911.5,3140.39 1944.61,3140.39 ; R38.1@1923.34,3133.47 cw(c1940.07,3116.75) 1940.07,3140.39 cw(c1940.07,3164.04) R38.1@1923.34,3147.32 ; 1945.13,3139.87 ccw(c1955,3149.73) v1@1955,3135.78 ; v1@1945.79,3130.6 ccw(c1938.96,3134.74) 1944.61,3140.39 ; v1@1955,3130 1944.61,3140.39 ; v1@2302.38,3090.62 ccw(c2259.83,3133.17) 2320,3133.17 ; v1@2306.62,3086.38 ccw(c2274.32,3118.68) 2320,3118.68 ; v1(2310,3083) 2320,3093 v1(2320,3155) 2329.02,3164.02 U7.24@2329.02,3194.68 cw(c2290.12,3194.68) v1@2313.52,3163.61 ; v1@2310.86,3082.14 ccw(c2288.8,3104.2) 2320,3104.2 ; v1@2317.13,3158.82 ccw(c2299.18,3182.66) U7.24@2329.02,3182.66 ; v1@2320.73,3154.02 ccw(c2308.23,3170.63) 2329.02,3170.63 ; U7.24@2324.18,3183.15 cw(c2312.5,3171.47) 2329.02,3171.47 cw(c2345.53,3171.47) U7.24@2333.85,3183.15
DCDC_EN: R10.1 U1.41 U4.1 | length 949.3
  Top Layer w6: v1(1720,2395) v1(1845,2270) ; v1@2077,2403.22 cw(c2077,2377.2) 2095.4,2395.6 cw(c2113.8,2414) v1@2087.78,2414 ; v1(2077,2414) 2100,2391 2100,2285 v1@2215,2170 ; 2193.06,2191.94 ccw(c2220,2218.87) v1@2220,2180.78 ; 2203.31,2181.69 ccw(c2220,2198.39) v1@2220,2174.78 ; 2205.13,2179.87 cw(c2195.27,2170) v1@2209.22,2170
  Bottom Layer w6: v1@1731.89,2393.11 U1.41@1769.96,2393.11 ; v1(1845,2270) 1916.82,2270 2066.82,2420 v1@2075,2420 ; v1@1852.62,2262.38 cw(c1871.02,2243.98) 1871.02,2270 cw(c1871.02,2296.02) v1@1852.62,2277.62
  other v1: 2220,2170
ESP_PWR: M1.3 U1.86 | length 2814.3
  Top Layer w6: v1@1320,1249.22 cw(c1320,1184.07) 1366.07,1230.14 ; v1@1320,1255.22 cw(c1320,1204.56) 1355.83,1240.38 ; v1(1320,1260) 1336.21,1260 ; v1@1320,1261.22 cw(c1320,1225.04) 1345.58,1250.62 ; v1@1320,1267.22 cw(c1320,1245.53) 1335.34,1260.87 ; v1@1329.94,1255.83 cw(c1336.21,1253.21) 1336.21,1260 ; v1@1329.94,1264.17 ccw(c1336.21,1266.79) 1336.21,1260 ; M1.3@2173.36,875.34 ccw(c2148.18,893.18) 2170,915 ; 2175.03,909.97 cw(c2154.07,889.01) M1.3@2178.25,871.87 ; 2180.06,904.94 cw(c2159.95,884.84) M1.3@2183.15,868.4 ; 2185.08,899.92 cw(c2165.84,880.67) M1.3@2188.04,864.93 ; 2190.11,894.89 cw(c2171.72,876.5) M1.3@2192.94,861.46 ; M1.3@2191.75,886.33 ccw(c2191.3,890) 2195,890 ; M1.3@2195,860 2195,890 ; 2195.14,889.86 cw(c2177.6,872.33) M1.3@2197.83,857.99 ; M1.3@2198.25,886.33 cw(c2198.7,890) 2195,890 ; 1336.21,1260 1371,1225.21 1371,726.12 1430.12,667 1843.97,667 1902,725.03 1902,872 1945,915 2170,915 ; 2170,915 2195,890
  Bottom Layer w6: v1@1312.38,1267.62 ccw(c1293.98,1286.02) 1320,1286.02 ccw(c1346.02,1286.02) v1@1327.62,1267.62 ; v1(1320,1260) 1320,1310 1303,1327 1303,1548 1338.19,1583.19 1338.19,1745.7 1349.72,1757.23 1349.72,1896.69 1368.39,1915.36 U1.86@1368.39,1960.04